# Altium PCB Encoder.PcbDoc
Units mm, origin at the board's own origin, x right, y up, seen from the top; angles counter-clockwise.
Board outline 19 x 19 mm, 2 copper layers (Top Layer, Bottom Layer), stack 0.8 mm thick; 8 components, 6 nets, 20 pads, 1 vias.
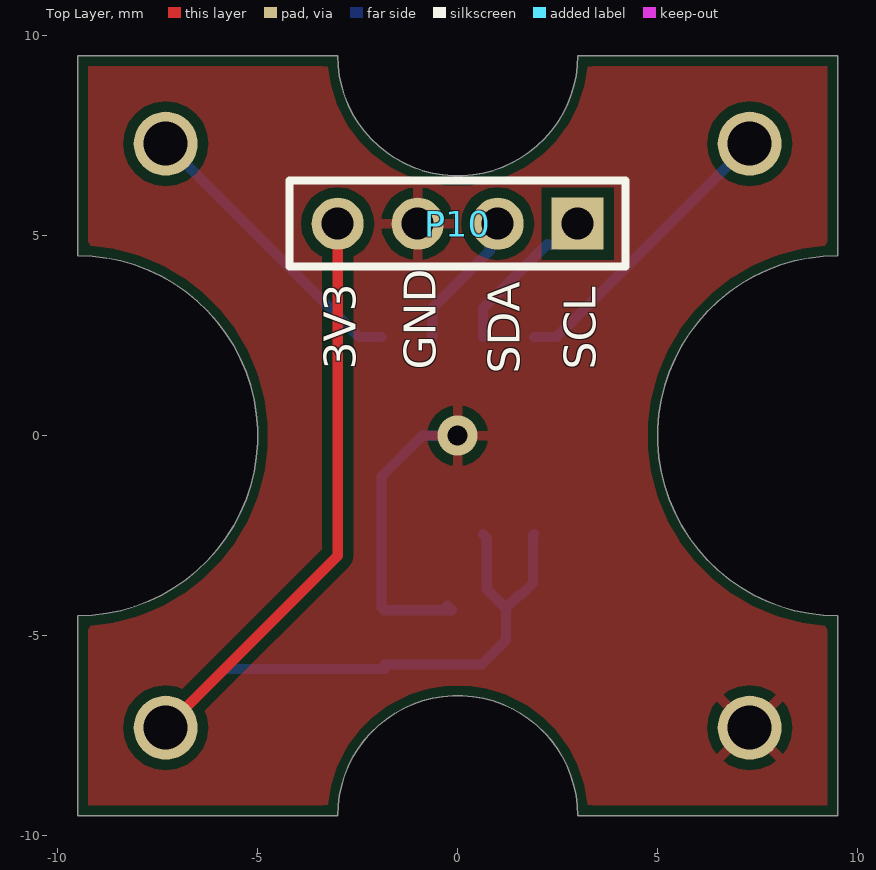
[diagram p0: Top Layer view]
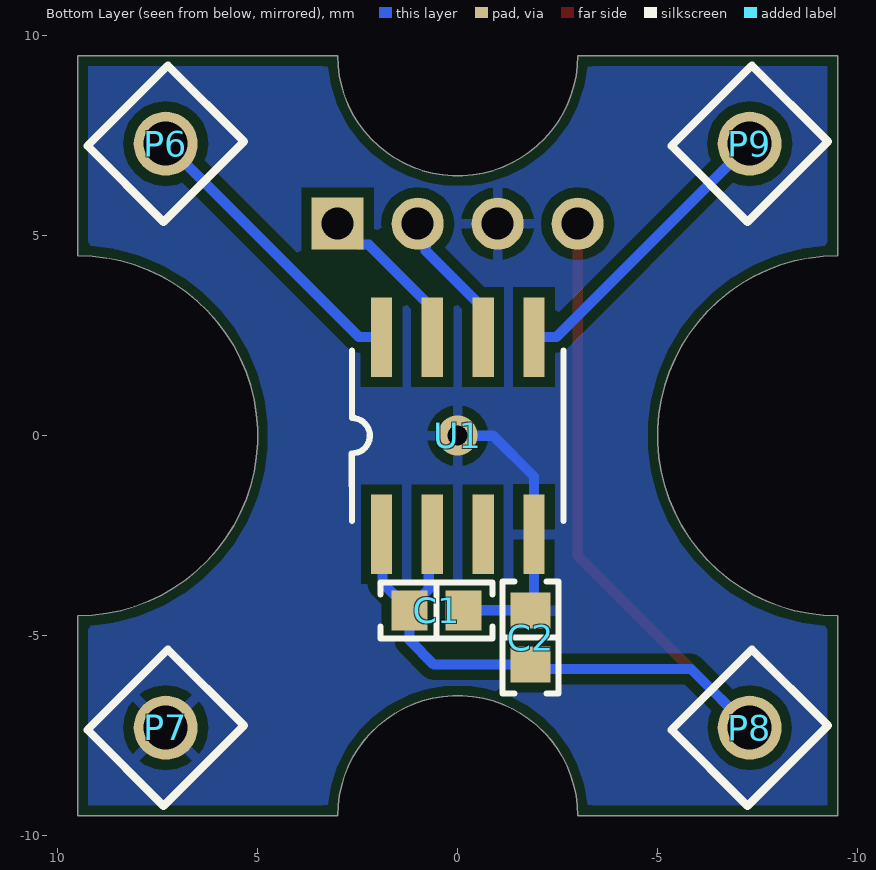
[diagram p1: Bottom Layer view, seen from below]
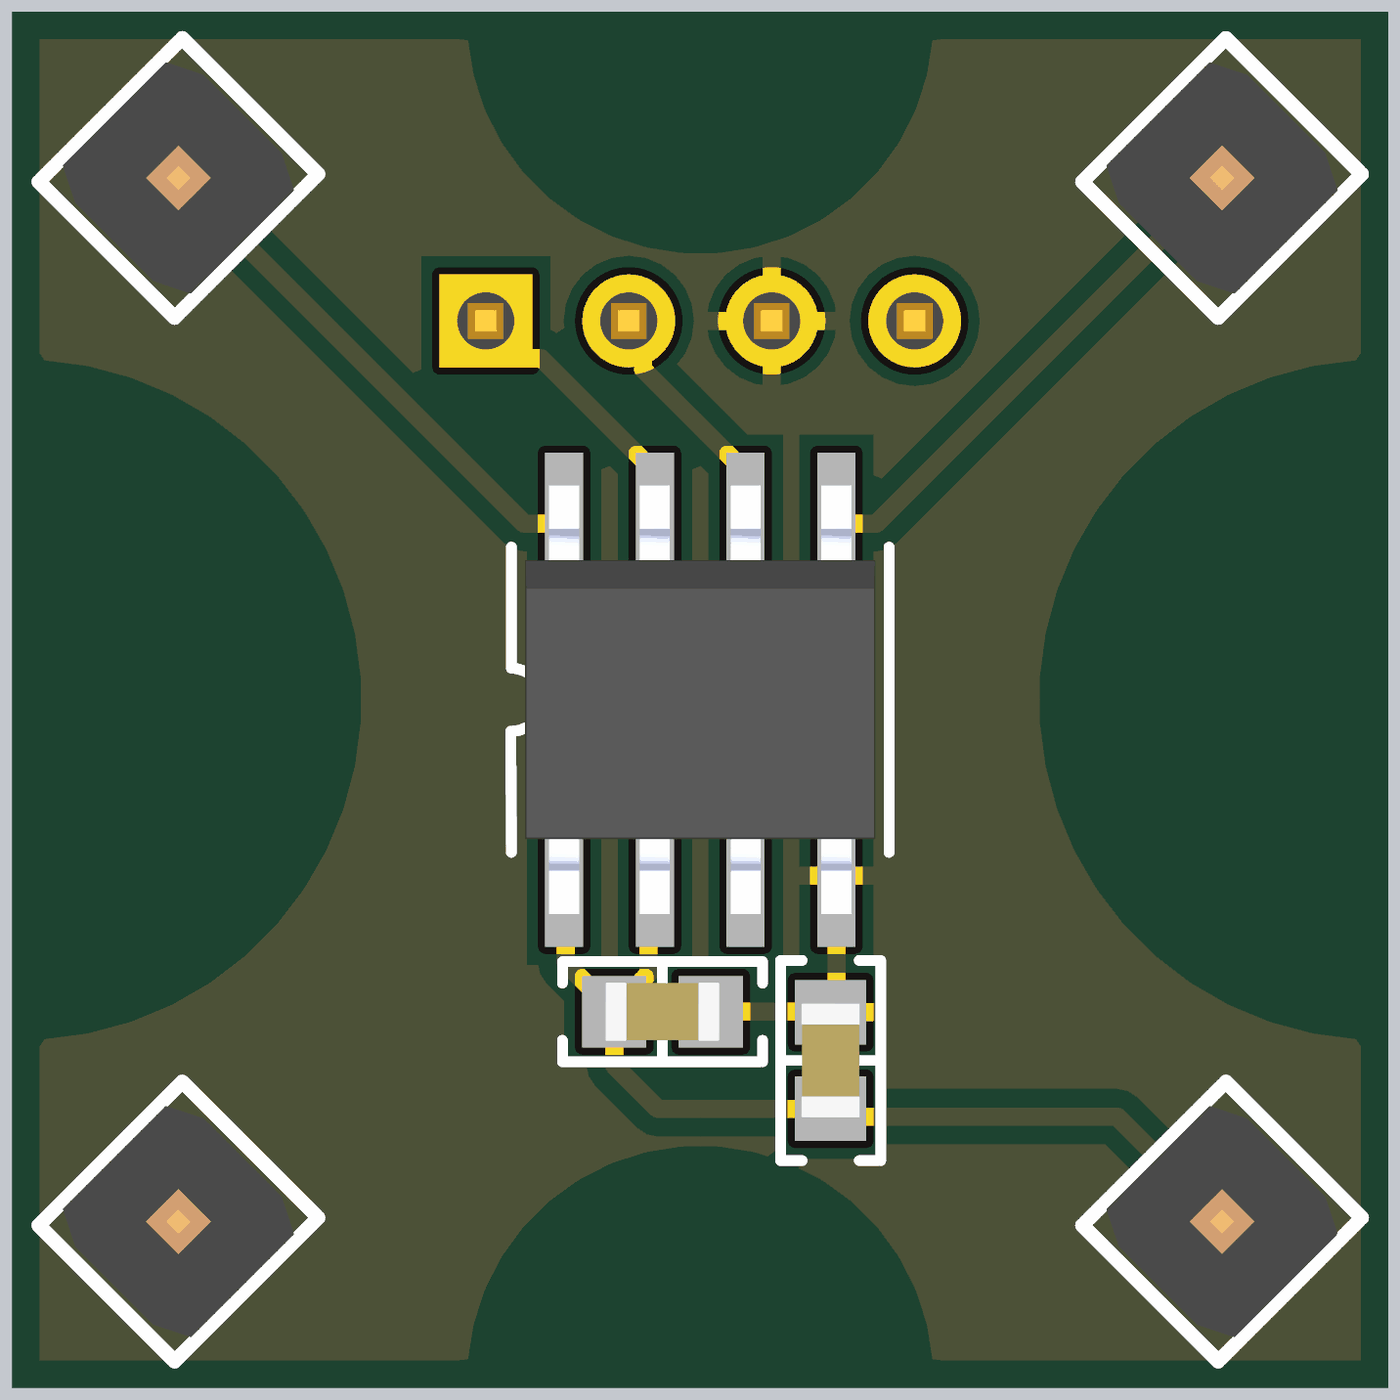
[diagram p2: 3D render of the assembled board from below, using the file's embedded part models]

## Layer stack, top to bottom
Top Solder: solder mask 0.01, Solder Resist, Dk 3.5
Top Layer: signal copper 0.035
Dielectric 1: dielectric 0.73, FR-4, Dk 4.8
Bottom Layer: signal copper 0.035
Bottom Solder: solder mask 0.01, Solder Resist, Dk 3.5

## Board outline
-9.5,-9.5 -9.5,-4.501 ccw(c-9.5,0) -9.5,4.501 -9.5,9.5 -3.002,9.5 ccw(c0,9.5) 3.002,9.5 9.5,9.5 9.5,4.501 ccw(c9.5,0) 9.5,-4.501 9.5,-9.5 3.002,-9.5 ccw(c0,-9.5) -3.002,-9.5

## Design rules (kind name [scope] priority, off if disabled: settings)
BoardOutlineClearance [All] p1: gap=0.254 ignorepadtopadclearanceinfootprint=FALSE except(0: Arc-SplitContinuation Track-SplitContinuation SMDPad-SplitContinuation THPad-SplitContinuation Via-SplitContinuation Fill-SplitContinuation Poly-SplitContinuation Region-SplitContinuation Text-SplitContinuation)
Clearance [All] p1: gap=0.254 ignorepadtopadclearanceinfootprint=FALSE except(0: Arc-Hole Track-Hole SMDPad-Hole THPad-Hole Via-Hole Fill-Hole Poly-Hole Region-Hole Text-Hole)
PolygonConnect [All] p1: connectstyle=Relief reliefconductorwidth=0.254 reliefentries=4 polygonreliefangle="90 Angle" airgapwidth=0.254
RoutingVias [All] p1: holewidth=0.711 width=1.27 viastyle="Through Hole" minholewidth=0.711 minwidth=1.27 maxholewidth=0.711 maxwidth=1.27
SolderMaskExpansion [All] p1: expansion=0.102 istentingtop=FALSE
Width [All] p1: maxlimit=0.254 minlimit=0.254 preferedwidth=0.254
30 further rules are at their usual default settings.

## Components (designator, comment, footprint, x,y, rotation, side; value= is the part's Value field where it differs from the comment)
C1 "1µF" "CAP 0603_1608" 0.528,-4.364 r180 bottom
C2 "10µF" "CAP 0603_1608" -1.825,-5.047 r90 bottom
P6 "61300111121" 61300111121#1 7.3,7.3 r135 bottom
P7 "61300111121" 61300111121#1 7.3,-7.3 r135 bottom
P8 "61300111121" 61300111121#2 -7.3,-7.3 r135 bottom
P9 "61300111121" 61300111121#1 -7.3,7.3 r135 bottom
P10 "62000411121" 62000411121 0,5.3 r180 top
U1 "Hall effect encoder" SOIC-8 0,0 r90 bottom

## Footprints (in the part's own frame and the unit in brackets; to place one, negate y for a bottom-side part, rotate by r counter-clockwise, add the part's x,y. Pads: shape width x height; smd on the part's side, far side on the other; paste and mask are expansions set on the pad)
61300111121#1 [mm] "Pin Header, pitch 2.54 mm, THT, Vertical, single row, 1p"
  round 1.6 hole 1.1 mask+0.102: 1(0,0)
  silkscreen extent -1.42,-1.34 1.42,1.34, body extent -1.27,-1.27 1.27,1.27, height 8.57
61300111121#2 [mm] "Pin Header, pitch 2.54 mm, THT, Vertical, single row, 1p"
  round 1.6 hole 1.1: 1(0,0)
  silkscreen extent -1.42,-1.34 1.42,1.34, body extent -1.27,-1.27 1.27,1.27, height 8.57
62000411121 [mm] "Pin Header, pitch 2.00 mm, THT, Vertical, single row, 4p"
  rect 1.3x1.3 hole 0.8: 1(-3,0)
  round 1.3 hole 0.8: 2(-1,0) 3(1,0) 4(3,0)
  silkscreen extent -4.2,-1.07 4.2,1.07, body extent -4,-1 4,1, height 6.05
"CAP 0603_1608" [mm] "Chip Capacitor, 2-Leads, Body 1.60x0.80mm, IPC Medium Density"
  rect 0.9x1 smd: 1(-0.675,0) 2(0.675,0)
  silkscreen extent -1.4,-0.7 1.4,0.7, body extent -0.8,-0.41 0.8,0.41, height 0.82
SOIC-8 [mil]
  rect 78x21 smd: 1(-97,75) 2(-97,25) 3(-97,-25) 4(-97,-75) 5(97,-75) 6(97,-25) 7(97,25) 8(97,75)
  silkscreen extent -84,-104 84,104, body extent -118,-96 118,97, height 69

## Part data
C1: library part VJ0603V105MXQPW1BC, "CAP CER 1UF 10V Y5V 0603", Device Package="0603 (1608 Metric)", Manufacturer="Vishay Vitramon", Operating Temperature="-25°C ~ 85°C", Supplier Part Number 1=720-1674-1-ND, Temperature Coefficient="Y5V (F)", Tolerance=±20%, Applications="General Purpose", Capacitance=1µF, ComponentLink1Description=Datasheet, ComponentLink1URL=https://www.vishay.com/docs/28548/vjw1bcbascomseries.pdf, ComponentLink2Description="DigiKey Link", ComponentLink2URL=http://digikey.com/product-detail/en/vishay-vitramon/VJ0603V105MXQPW1BC/720-1674-1-ND/8324094, LastUpdated="30-Aug-20 8:42:38 PM", Lifecycle Status=Active, Minimum Order=1, Mounting Type="Surface Mount, MLCC", Package / Case="0603 (1608 Metric)", Packaging=TapeAndReel, Part Number=VJ0603V105MXQPW1BC, Part Status=Active, PartId=7087, Price=0.04, Series=VJ, Size / Dimension="0.063\" L x 0.031\" W (1.60mm x 0.80mm)", Supplier 1=DigiKey, Thickness (Max)="0.034\" (0.87mm)"
C2: library part C1608X5R0J106K080AE, "CAP CER 10UF 6.3V X5R 0603", Device Package="0603 (1608 Metric)", Manufacturer="TDK Corporation", Operating Temperature="-55°C ~ 85°C", Supplier Part Number 1=445-175223-1-ND, Temperature Coefficient=X5R, Tolerance=±10%, Applications="Boardflex Sensitive", Capacitance=10µF, ComponentLink1Description=Datasheet, ComponentLink1URL=https://product.tdk.com/info/en/catalog/datasheets/mlcc_commercial_soft_en.pdf?ref_disty=digikey, ComponentLink2Description="DigiKey Link", ComponentLink2URL=http://digikey.com/product-detail/en/tdk-corporation/C1608X5R0J106K080AE/445-175223-1-ND/7907787, Features="Soft Termination", LastUpdated="30-Aug-20 8:42:44 PM", Lifecycle Status=Active, Minimum Order=1, Mounting Type="Surface Mount, MLCC", Package / Case="0603 (1608 Metric)", Packaging=TapeAndReel, Part Number=C1608X5R0J106K080AE, Part Status=Active, PartId=4436, Price=0.05, Series=C, Size / Dimension="0.063\" L x 0.031\" W (1.60mm x 0.80mm)", Supplier 1=DigiKey, Thickness (Max)="0.039\" (1.00mm)"
P6 P7 P8 P9: "WR-PHD Pin Header, THT, pitch 2.54mm, Single Row, Vertical, 1p", Contact Resistance=20mOhm, Manufacturer="Wurth Elektronik", Operating Temperature="-40 to +105degC", Rated Current=3A, Withstanding Voltage=500VAC, Working Voltage=250VAC, ComponentLink1Description=Manufacturer, ComponentLink1URL=http://www.we-online.de, ComponentLink2Description=Datasheet, ComponentLink2URL=https://www.we-online.com/catalog/datasheet/61300111121.pdf, Gender="Pin Header", Manufacturer Part Number=61300111121, Mounting Technology=THT, Orientation=Vertical, Packaging=Bag, Pin Number=1, Pitch=2.54mm, Published Date="May 2020", Row Number=Single
P10: "WR-PHD Pin Header, THT, pitch 2mm, Single Row, Vertical, 4p", Contact Resistance=20mOhm, Manufacturer="Wurth Elektronik", Operating Temperature="-40 to +105degC", Rated Current=2A, Withstanding Voltage=500VAC, Working Voltage=200VAC, ComponentLink1Description=Manufacturer, ComponentLink1URL=http://www.we-online.de, ComponentLink2Description=Datasheet, ComponentLink2URL=https://www.we-online.com/catalog/datasheet/62000411121.pdf, Gender="Pin Header", Manufacturer Part Number=62000411121, Mounting Technology=THT, Orientation=Vertical, Packaging=Bag, Pin Number=4, Pitch=2mm, Published Date="May 2020", Row Number=Single
U1: library part AS5601, "Hall effect rotary encoder - AB quadrature out"

## Via types
v1: diameter 1, hole 0.5, Top Layer to Bottom Layer, tented both sides, 1 vias

## Nets (pads, with @x,y where several pads share a name; then routed paths per layer and width w, separated by ;. In a path a pad name is that pad's centre, name@x,y a point inside that pad or via, vN(x,y) a via of type N, cw(c..) or ccw(c..) an arc to the next point about the centre after c; other vN are vias at no path point)
3V3: C1.1 C2.1 P8.1 P10.4 U1.1 U1.2 | length 28.8
  Top Layer w0.254: P8.1 -3,-3 P10.4
  Bottom Layer w0.254: P8.1 -5.832,-5.832 C2.1@-1.825,-5.832 ; C2.1 0.595,-5.722 1.203,-5.114 C1.1 C1.1@1.203,-4.314 ; U1.2 0.724,-2.553 0.724,-3.835 C1.1@1.203,-4.314 ; U1.1 1.881,-2.488 1.881,-3.687 1.576,-3.991 1.526,-3.991 C1.1@1.203,-4.314
A: P6.1 U1.8 | length 7.4
  Bottom Layer w0.254: U1.8 2.464,2.464 P6.1
B: P9.1 U1.5 | length 7.4
  Bottom Layer w0.254: P9.1 -2.464,2.464 U1.5
GND: C1.2 C2.2 P7.1 P10.3 U1.4 | length 7.6
  Bottom Layer w0.254: C1.2@-0.261,-4.25 C1.2 -1.817,-4.364 C2.2 -1.905,-4.292 U1.4 -1.905,-1.021 -0.884,0 v1(0,0) ; P7.1 P7.1@7.3,-7.272
SCL: P10.1 U1.7 | length 4
  Bottom Layer w0.254: U1.7 0.635,3.188 2.224,4.777 2.477,4.777 P10.1
SDA: P10.2 U1.6 | length 3.5
  Bottom Layer w0.254: U1.6 -0.635,3.188 0.8,4.623 0.8,5.1 P10.2
pads on no net: U1.3

## Polygon pours and split planes (outlines as drawn)
GND on Top Layer "NONET_L02_P-001" (solid, pour order 1): -9.5,9.5 -9.5,-9.5 9.5,-9.5 9.5,9.5
GND on Bottom Layer "NONET_L02_P-001" (solid, pour order 0): -9.5,9.5 -9.5,-9.5 9.5,-9.5 9.5,9.5

## Silkscreen, mask and mechanical layers (free items; w line width, h text height)
Top Overlay:
  text "3V3" at -2.553,1.653 h0.8 r90
  text "GND" at -0.553,1.653 h0.8 r90
  text "SCL" at 3.447,1.653 h0.8 r90
  text "SDA" at 1.547,1.553 h0.8 r90
Board Outline:
  lines w0.2: -9.5,-4.501 -9.5,-9.5 -3.002,-9.5 ; -9.5,4.501 -9.5,9.5 -3.002,9.5 ; 3.002,-9.5 9.5,-9.5 9.5,-4.501 ; 3.002,9.5 9.5,9.5 9.5,4.501 ; -3.002,-9.5 -3.002,-9.5
  lines w0.254: -9.5,-4.501 ccw(c-9.5,0) -9.5,4.501 ; -3.002,-9.5 cw(c0,-9.5) 3.002,-9.5 ; -3.002,9.5 ccw(c0,9.5) 3.002,9.5 ; 9.5,-4.501 cw(c9.5,0) 9.5,4.501